# Altium PCB PCB1.PcbDoc
Units mm, origin at the board's own origin, x right, y up, seen from the top; angles counter-clockwise.
Board outline 60.25 x 70.25 mm, 2 copper layers (Top Layer, Bottom Layer); 25 components, 27 nets, 97 pads, 2 vias.
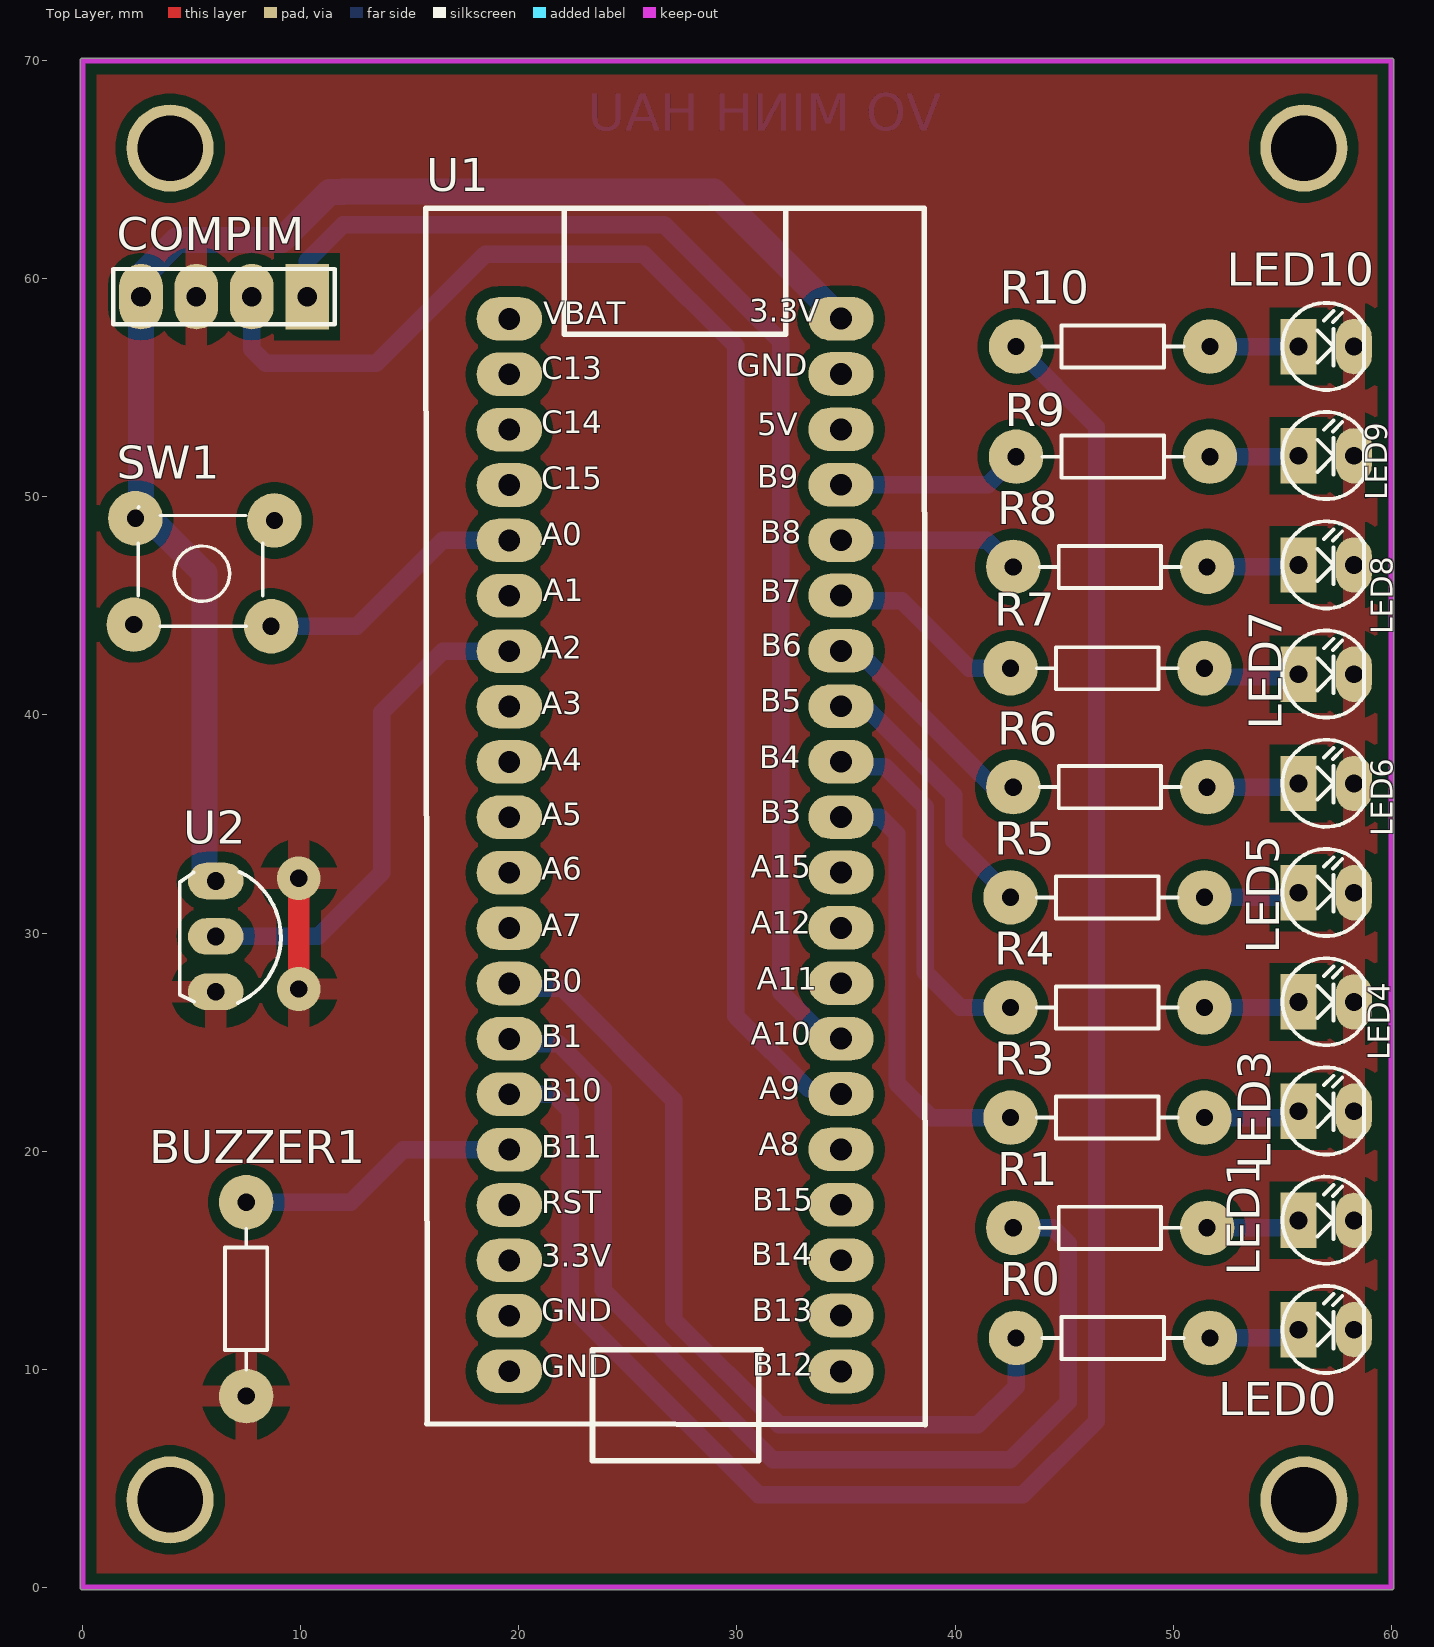
[diagram p0: Top Layer view]
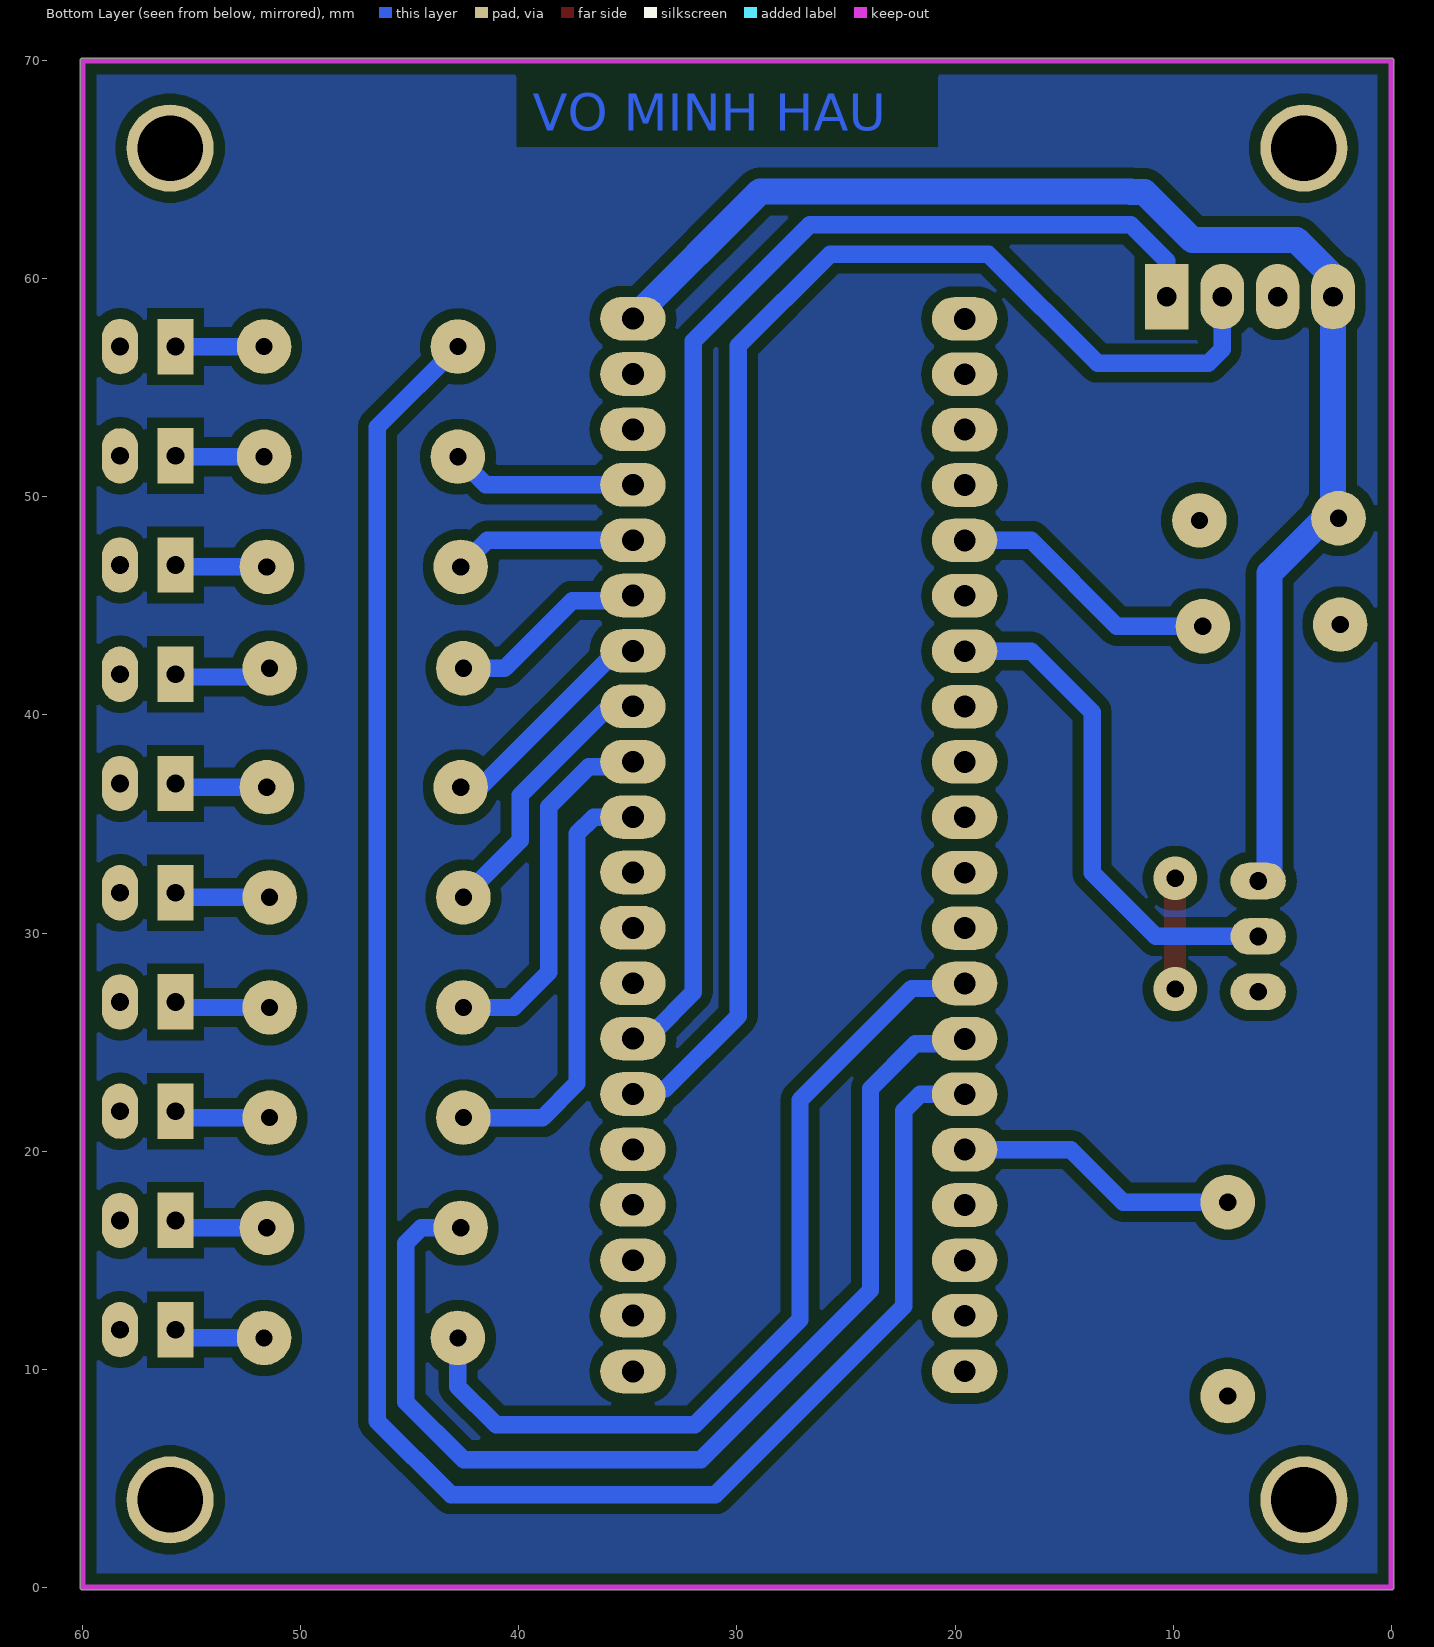
[diagram p1: Bottom Layer view, seen from below]
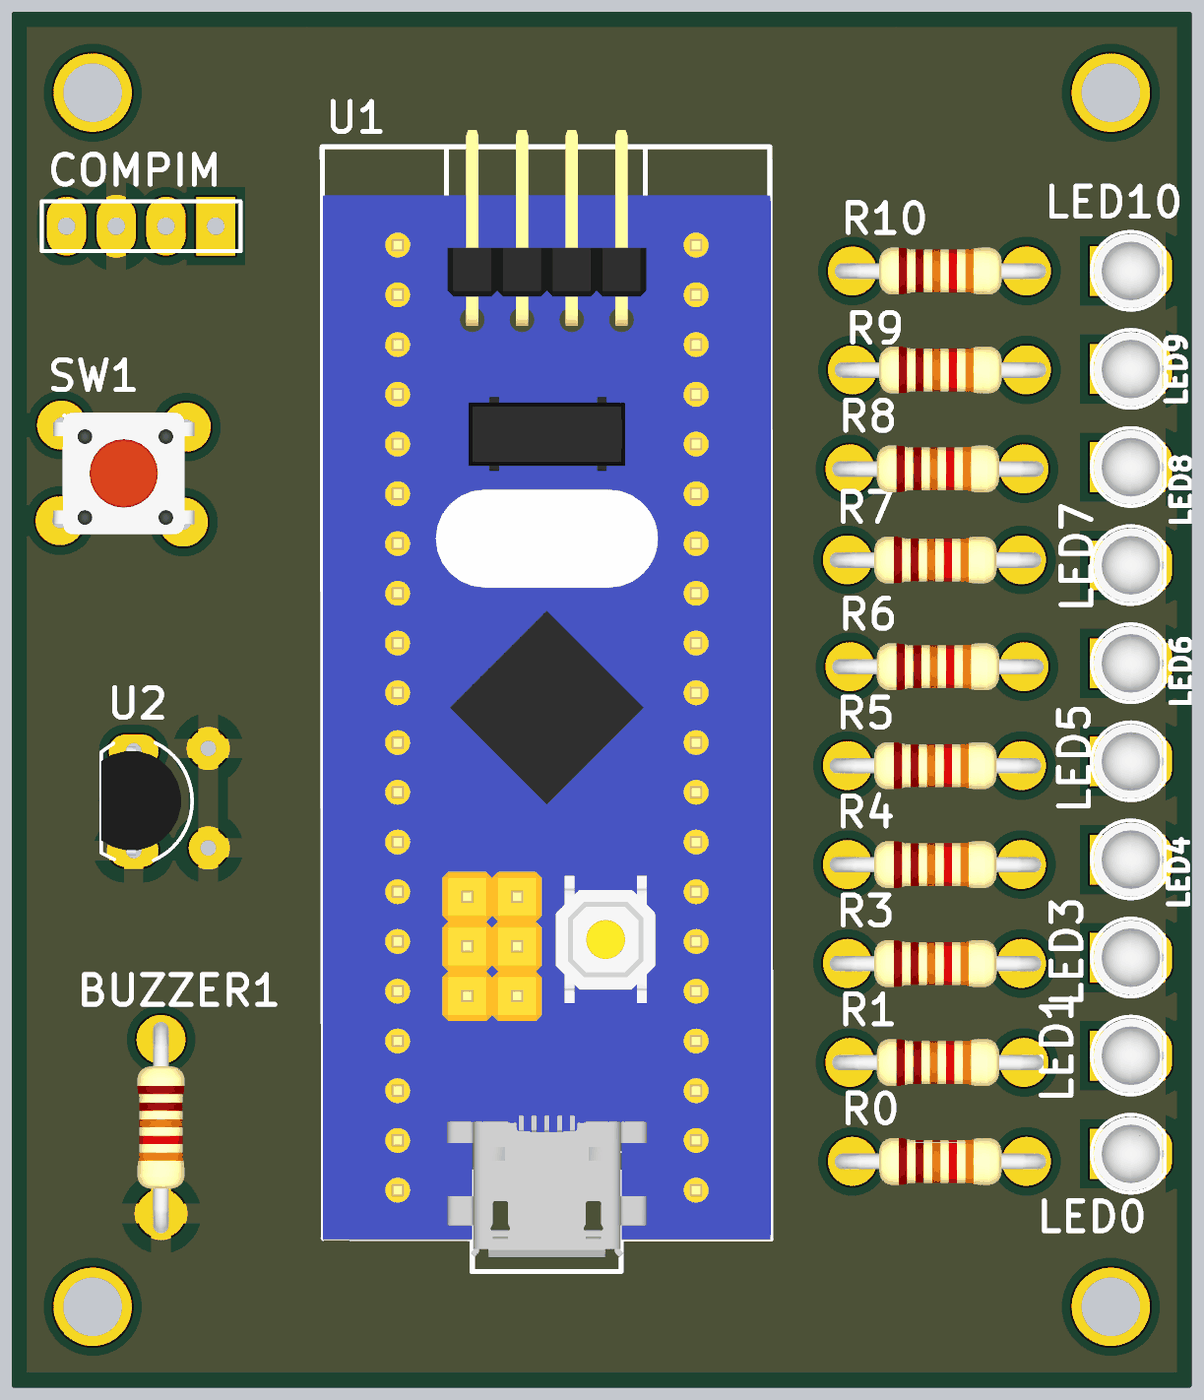
[diagram p2: 3D render of the assembled board from above, using the file's embedded part models]

## Layer stack, top to bottom
Top Solder: solder mask 0.0102, Solder Resist, Dk 3.5
Top Layer: signal copper 0.0356
Dielectric 1: dielectric 0.32, FR-4, Dk 4.8
Bottom Layer: signal copper 0.0356
Bottom Solder: solder mask 0.0102, Solder Resist, Dk 3.5

## Board outline
-0.127,0 ccw(c0,0) 0,-0.127 60,-0.127 ccw(c60,0) 60.127,0 60.127,70 ccw(c60,70) 60,70.127 0,70.127 ccw(c0,70) -0.127,70

## Design rules (kind name [scope] priority, off if disabled: settings)
Clearance [All] p1: gap=0.5 ignorepadtopadclearanceinfootprint=FALSE
PolygonConnect [All] p1: connectstyle=Relief reliefconductorwidth=1 reliefentries=4 polygonreliefangle="90 Angle" airgapwidth=0.8
RoutingVias [All] p1: holewidth=0.711 width=1.27 viastyle="Through Hole" minholewidth=0.711 minwidth=1.27 maxholewidth=0.711 maxwidth=1.27
SolderMaskExpansion [All] p1: expansion=0.102 istentingtop=FALSE
Width [All] p1: maxlimit=1.2 minlimit=0.8 preferedwidth=1
30 further rules are at their usual default settings.

## Components (designator, comment, footprint, x,y, rotation, side; value= is the part's Value field where it differs from the comment)
BUZZER1 "330" R1/4W 7.493,8.763 r90 top value="R1/4W - 1K"
COMPIM "Header 4P" HDR1X4 10.287,59.182 r180 top
LED0 "LED" LED-3 55.753,11.811 r0 top value="LED 3 ly Single Colour"
LED1 "LED" LED-3 55.753,16.82 r0 top value="LED 3 ly Single Colour"
LED3 "LED" LED-3 55.753,21.83 r0 top value="LED 3 ly Single Colour"
LED4 "LED" LED-3 55.753,26.839 r0 top value="LED 3 ly Single Colour"
LED5 "LED" LED-3 55.753,31.849 r0 top value="LED 3 ly Single Colour"
LED6 "LED" LED-3 55.753,36.858 r0 top value="LED 3 ly Single Colour"
LED7 "LED" LED-3 55.753,41.868 r0 top value="LED 3 ly Single Colour"
LED8 "LED" LED-3 55.753,46.877 r0 top value="LED 3 ly Single Colour"
LED9 "LED" LED-3 55.753,51.887 r0 top value="LED 3 ly Single Colour"
LED10 "LED" LED-3 55.753,56.896 r0 top value="LED 3 ly Single Colour"
R0 "330" R1/4W 51.689,11.43 r180 top value="R1/4W - 1K"
R1 "330" R1/4W 51.562,16.482 r180 top value="R1/4W - 1K"
R3 "330" R1/4W 51.435,21.534 r180 top value="R1/4W - 1K"
R4 "330" R1/4W 51.435,26.585 r180 top value="R1/4W - 1K"
R5 "330" R1/4W 51.435,31.637 r180 top value="R1/4W - 1K"
R6 "330" R1/4W 51.562,36.689 r180 top value="R1/4W - 1K"
R7 "330" R1/4W 51.435,42.143 r180 top value="R1/4W - 1K"
R8 "330" R1/4W 51.562,46.792 r180 top value="R1/4W - 1K"
R9 "330" R1/4W 51.689,51.844 r180 top value="R1/4W - 1K"
R10 "330" R1/4W 51.689,56.896 r180 top value="R1/4W - 1K"
SW1 "SW" SW4 8.636,44.069 r180 top value="Button chip 4 pin"
U1 "STM32F103C8T6" "Stm32 BluePill" 26.944,39.8 r0 top
U2 "LM35" QTO-92 6.096,29.845 r270 top

## Footprints (in the part's own frame and the unit in brackets; to place one, negate y for a bottom-side part, rotate by r counter-clockwise, add the part's x,y. Pads: shape width x height; smd on the part's side, far side on the other; paste and mask are expansions set on the pad)
HDR1X4 [mm] "Connector; Header; 4 Position"
  rect 2x3 hole 0.9 unplated: 1(0,0)
  oval 2x3 hole 0.9 unplated: 2(2.54,0) 3(5.08,0) 4(7.62,0)
  silkscreen extent -1.27,-1.27 8.89,1.27, body extent -1.27,-1.27 8.89,1.27, height 7
LED-3 [mil] "LED 2 PIN, 3ly Only colour"
  rect 65x100 hole 32: 1(0,0)
  oval 65x100 hole 32: 2(100,0)
  silkscreen extent -29,-78 118,79, body extent -25,-75 113,75, height 217
QTO-92 [mil] "TO-92"
  oval 66x100 hole 32: 1(-100,0) 2(0,0) 3(100,0)
  silkscreen extent -117,-65 120,118, body extent -109,-66 109,95, height 245
R1/4W [mm] "R 1/4W, 2 Pin, 350mil"
  round 2.5 hole 0.787: 1(0,0) 2(8.89,0)
  silkscreen extent 1.22,-0.97 7.67,0.97, body extent -1.01,-1.19 9.79,1.21, height 2.83
"Stm32 BluePill" [mm]
  oval 3x2 hole 1: 1(7.828,-29.908) 2(7.828,-27.343) 3(7.828,-24.803) 4(7.828,-22.263) 5(7.828,-19.723) 6(7.828,-17.183) 7(7.828,-14.643) 8(7.828,-12.103) 9(7.828,-9.563) 10(7.828,-7.023) 11(7.828,-4.483) 12(7.828,-1.943) 13(7.828,0.597) 14(7.828,3.137) 15(7.828,5.677) 16(7.828,8.217) 17(7.828,10.757) 18(7.828,13.297) 19(7.828,15.837) 20(7.828,18.377) 21(-7.386,18.366) 22(-7.386,15.826) 23(-7.386,13.286) 24(-7.386,10.746) 25(-7.386,8.206) 26(-7.386,5.666) 27(-7.386,3.126) 28(-7.386,0.586) 29(-7.386,-1.954) 30(-7.386,-4.494) 31(-7.386,-7.034) 32(-7.386,-9.574) 33(-7.386,-12.114) 34(-7.386,-14.654) 35(-7.386,-17.194) 36(-7.386,-19.734) 37(-7.386,-22.274) 38(-7.386,-24.814) 39(-7.386,-27.354) 40(-7.386,-29.894)
  silkscreen extent -11.22,-34 11.69,23.43, body extent -11.18,-33.27 11.68,24.29, height 12.31
SW4 [mil] "SW button 4pin, 250 x250 mil"
  round 98.43 hole 31: 1(0,0) 2(245,-195) 3(248,-3) 4(-6,-191)
  silkscreen extent 15,-215 240,0, body extent -36,-220 276,24, height 276

## Part data
BUZZER1 R0 R1 R3 R4 R5 R6 R7 R8 R9 R10: library part R1/4W, "Resistor 1/4W"
COMPIM: library part "Header 4x1", "Header, 4 Pin Pitch 2.54mm", MPN=S1012EC-40-ND, CompanyID=VT-00125, Solder=WAVE
LED0 LED1 LED3 LED4 LED5 LED6 LED7 LED8 LED9 LED10: "LED Single colour Green and Red"
SW1: library part SW4, "Switch button 4 pin"
U1: library part BluePill, "Designed By @Alixahedi"
U2: "Teminal"

## Free pads (board coordinates)
  round 4 hole 3: ""(4,4) ""(4,66) ""(56,4) ""(56,66)

## Via types
v1: diameter 2, hole 0.8, Top Layer to Bottom Layer, 2 vias

## Nets (pads, with @x,y where several pads share a name; then routed paths per layer and width w, separated by ;. In a path a pad name is that pad's centre, name@x,y a point inside that pad or via, vN(x,y) a via of type N, cw(c..) or ccw(c..) an arc to the next point about the centre after c; other vN are vias at no path point)
3V3: COMPIM.4 SW1.2 U1.20 U2.1 | length 66
  Bottom Layer w1.2: U2.1 5.793,32.385 5.573,32.605 5.573,46.497 3.048,49.022 SW1.2 2.667,49.276 COMPIM.4 2.667,60.112 4.337,61.782 9.115,61.782 11.317,63.984 11.938,63.984 ; 11.938,64.008 28.941,64.008 U1.20
GND: BUZZER1.1 COMPIM.3 LED0.2 LED1.2 LED3.2 LED4.2 LED5.2 LED6.2 LED7.2 LED8.2 LED9.2 LED10.2 U2.3 | length 5.1
  Top Layer w1: v1(9.906,27.432) v1(9.906,32.512)
NetBUZZER1_2: BUZZER1.2 U1.36 | length 13.1
  Bottom Layer w0.8: BUZZER1.2 12.289,17.653 14.702,20.066 U1.36
NetCOMPIM_1: COMPIM.1 U1.7 | length 61
  Bottom Layer w0.8: COMPIM.1@10.668,58.166 10.287,58.547 COMPIM.1 10.287,60.833 11.938,62.484 26.67,62.484 32.004,57.15 32.004,27.278 33.896,25.386 34.543,25.386 U1.7
NetCOMPIM_2: COMPIM.2 U1.6 | length 65.7
  Bottom Layer w0.8: COMPIM.2 7.747,56.769 8.382,56.134 13.462,56.134 18.466,61.138 25.73,61.138 29.94,56.928 29.94,26.194 33.288,22.846 34.543,22.846 U1.6
NetLED0_1: LED0.1 R0.1 | length 4.2
  Bottom Layer w0.8: R0.1 55.372,11.43 LED0.1
NetLED1_1: LED1.1 R1.1 | length 4.3
  Bottom Layer w0.8: R1.1 55.414,16.482 LED1.1
NetLED3_1: LED3.1 R3.1 | length 4.4
  Bottom Layer w0.8: R3.1 55.457,21.534 LED3.1
NetLED4_1: LED4.1 R4.1 | length 4.4
  Bottom Layer w0.8: R4.1 55.499,26.585 LED4.1
NetLED5_1: LED5.1 R5.1 | length 4.4
  Bottom Layer w0.8: R5.1 55.541,31.637 LED5.1
NetLED6_1: LED6.1 R6.1 | length 4.3
  Bottom Layer w0.8: R6.1 55.584,36.689 LED6.1
NetLED7_1: LED7.1 R7.1 | length 4.4
  Bottom Layer w0.8: R7.1@51.435,41.741 55.626,41.741 LED7.1
NetLED8_1: LED8.1 R8.1 | length 4.2
  Bottom Layer w0.8: R8.1 55.668,46.792 LED8.1
NetLED9_1: LED9.1 R9.1 | length 4.1
  Bottom Layer w0.8: R9.1 55.711,51.844 LED9.1
NetLED10_1: LED10.1 R10.1 | length 4.1
  Bottom Layer w0.8: R10.1 LED10.1
NetR0_2: R0.2 U1.33 | length 40.5
  Bottom Layer w0.8: U1.33 19.788,27.456 21.989,27.456 27.11,22.335 27.11,12.26 31.928,7.442 41.039,7.442 42.799,9.202 R0.2 R0.2@42.741,11.43
NetR1_2: R1.2 U1.34 | length 50.2
  Bottom Layer w0.8: U1.34 19.788,24.916 21.82,24.916 23.876,22.86 23.876,13.617 31.651,5.842 42.538,5.842 45.188,8.492 45.188,15.772 44.478,16.482 R1.2
NetR3_2: R3.2 U1.11 | length 20.2
  Bottom Layer w0.8: U1.11 36.565,35.317 37.338,34.544 37.338,23.114 38.918,21.534 R3.2
NetR4_2: R4.2 U1.12 | length 16.9
  Bottom Layer w0.8: U1.12 35.002,37.627 36.795,37.627 38.638,35.784 38.638,28.194 40.247,26.585 R4.2
NetR5_2: R5.2 U1.13 | length 12.6
  Bottom Layer w0.8: U1.13 35.002,40.167 36.093,40.167 39.938,36.322 39.938,34.244 R5.2
NetR6_2: R6.2 U1.14 | length 10.5
  Bottom Layer w0.8: U1.14 35.514,42.937 R6.2@42.418,36.033
NetR7_2: R7.2 U1.15 | length 9.2
  Bottom Layer w0.8: U1.15 35.002,45.247 37.557,45.247 40.661,42.143 R7.2
NetR8_2: R8.2 U1.16 | length 8.4
  Bottom Layer w0.8: U1.16 41.448,48.017 R8.2
NetR9_2: R9.2 U1.17 | length 8.8
  Bottom Layer w0.8: U1.17 41.512,50.557 R9.2 R9.2@42.534,51.844
NetR10_2: R10.2 U1.35 | length 92
  Bottom Layer w0.8: U1.35 21.59,22.606 22.352,21.844 22.352,12.878 30.988,4.242 43.114,4.242 46.488,7.616 46.488,53.207 R10.2
NetSW1_1: SW1.1 U1.25 | length 12.6
  Bottom Layer w0.8: SW1.1 12.573,44.069 16.51,48.006 U1.25
NetU1_27: U1.27 U2.2 | length 23.2
  Bottom Layer w0.8: U2.2 10.795,29.845 13.716,32.766 13.716,40.132 16.51,42.926 U1.27
pads on no net: SW1.3 SW1.4 U1.1 U1.2 U1.3 U1.4 U1.5 U1.8 U1.9 U1.10 U1.18 U1.19 U1.21 U1.22 U1.23 U1.24 U1.26 U1.28 U1.29 U1.30 U1.31 U1.32 U1.37 U1.38 U1.39 U1.40

## Polygon pours and split planes (outlines as drawn)
GND on Top Layer "GND_L01_P002" (solid, remove dead copper, pour order 2): 0,70.104 0,0 59.944,0 59.944,70.104
no net on Bottom Layer "NONET_L02_P003" (solid, pour order 3): 0,0 59.944,0 59.944,70.104 0,70.104

## Keep-outs
Keep-Out Layer:
  lines w0.254: 0,0 0,70 60,70 60,0 0,0

## Other copper
Bottom Layer:
  text "VO MINH HAU" at 39.37,66.802 h1.7

## Text inside footprints (layer, text, board x,y; h text height)
U1: Top Overlay "5V" at 30.937,52.494 h1.78; Top Overlay "B9" at 30.937,50.081 h1.78; Top Overlay "B8" at 31.064,47.541 h1.78; Top Overlay "3.3V" at 30.556,57.701 h1.78; Top Overlay "GND" at 29.992,55.187 h1.78; Top Overlay "A5" at 21.031,34.587 h1.78; Top Overlay "A2" at 21.031,42.238 h1.78; Top Overlay "A3" at 21.031,39.693 h1.78; Top Overlay "A4" at 21.031,37.108 h1.78; Top Overlay "RST" at 21.031,16.807 h1.78; Top Overlay "B10" at 21.031,21.938 h1.78; Top Overlay "B11" at 21.031,19.353 h1.78; Top Overlay "A6" at 21.031,32.098 h1.78; Top Overlay "A7" at 21.031,29.513 h1.78; Top Overlay "B0" at 21.031,26.967 h1.78; Top Overlay "B1" at 21.031,24.408 h1.78; Top Overlay "3.3V" at 21.031,14.344 h1.78; Top Overlay "B15" at 30.693,16.909 h1.78; Top Overlay "A8" at 31.001,19.474 h1.78; Top Overlay "A11" at 30.917,27.049 h1.78; Top Overlay "B3" at 31.064,34.689 h1.78; Top Overlay "A9" at 31.031,22.04 h1.78; Top Overlay "A15" at 30.63,32.2 h1.78; Top Overlay "A12" at 30.63,29.615 h1.78; Top Overlay "A10" at 30.63,24.529 h1.78; Top Overlay "VBAT" at 21.104,57.58 h1.78; Top Overlay "B5" at 31.064,39.794 h1.78; Top Overlay "B14" at 30.663,14.425 h1.78; Top Overlay "B7" at 31.064,44.829 h1.78; Top Overlay "B4" at 31.031,37.209 h1.78; Top Overlay "B6" at 31.095,42.36 h1.78; Top Overlay "C15" at 21.031,50.005 h1.78; Top Overlay "C13" at 21.031,55.06 h1.78; Top Overlay "C14" at 21.031,52.571 h1.78; Top Overlay "A0" at 21.031,47.44 h1.78; Top Overlay "A1" at 21.102,44.88 h1.78; Top Overlay "GND" at 21.031,11.854 h1.78; Top Overlay "B13" at 30.683,11.854 h1.78; Top Overlay "GND" at 21.031,9.289 h1.78; Top Overlay "B12" at 30.693,9.345 h1.78